# Altium PCB PCB1.1.PcbDoc
Units mil, origin at the board's own origin, x right, y up, seen from the top; angles counter-clockwise.
Board outline 7697 x 1698 mil, 2 copper layers (Top Layer, Bottom Layer); 47 components, 80 nets, 308 pads, 105 vias.
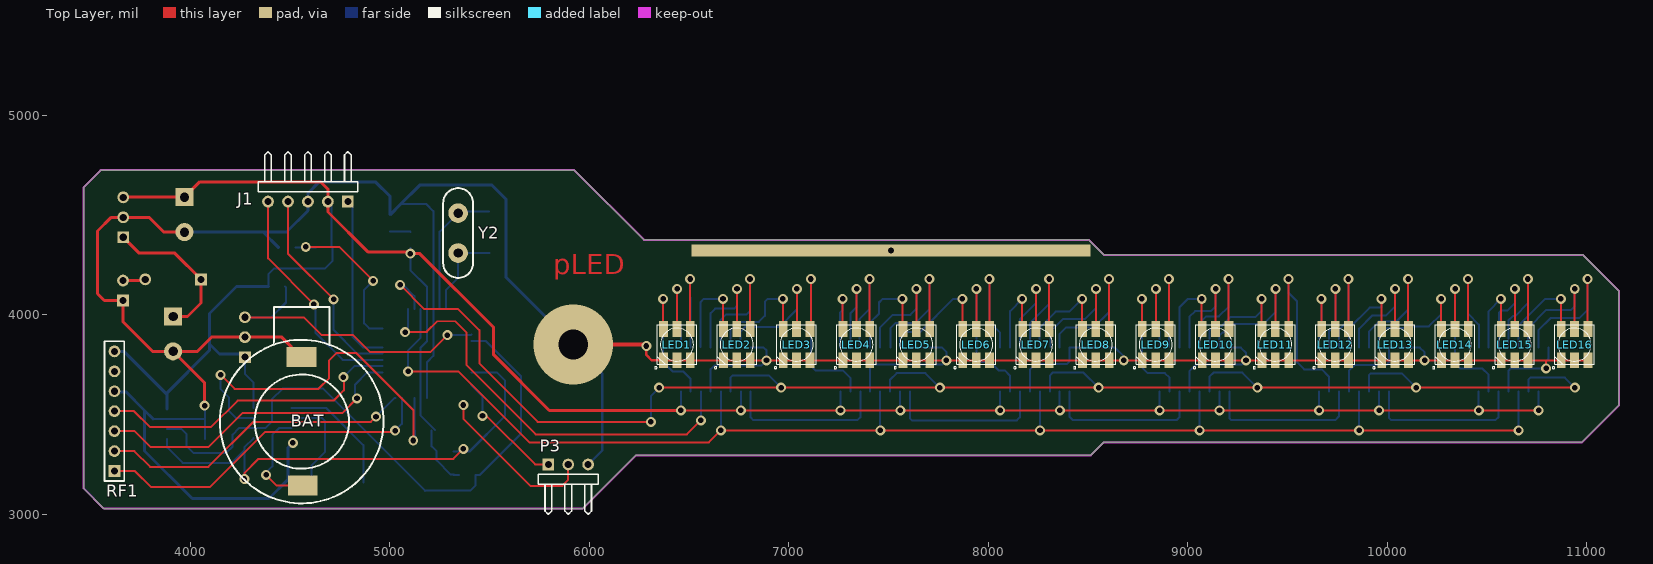
[diagram p0: Top Layer view]
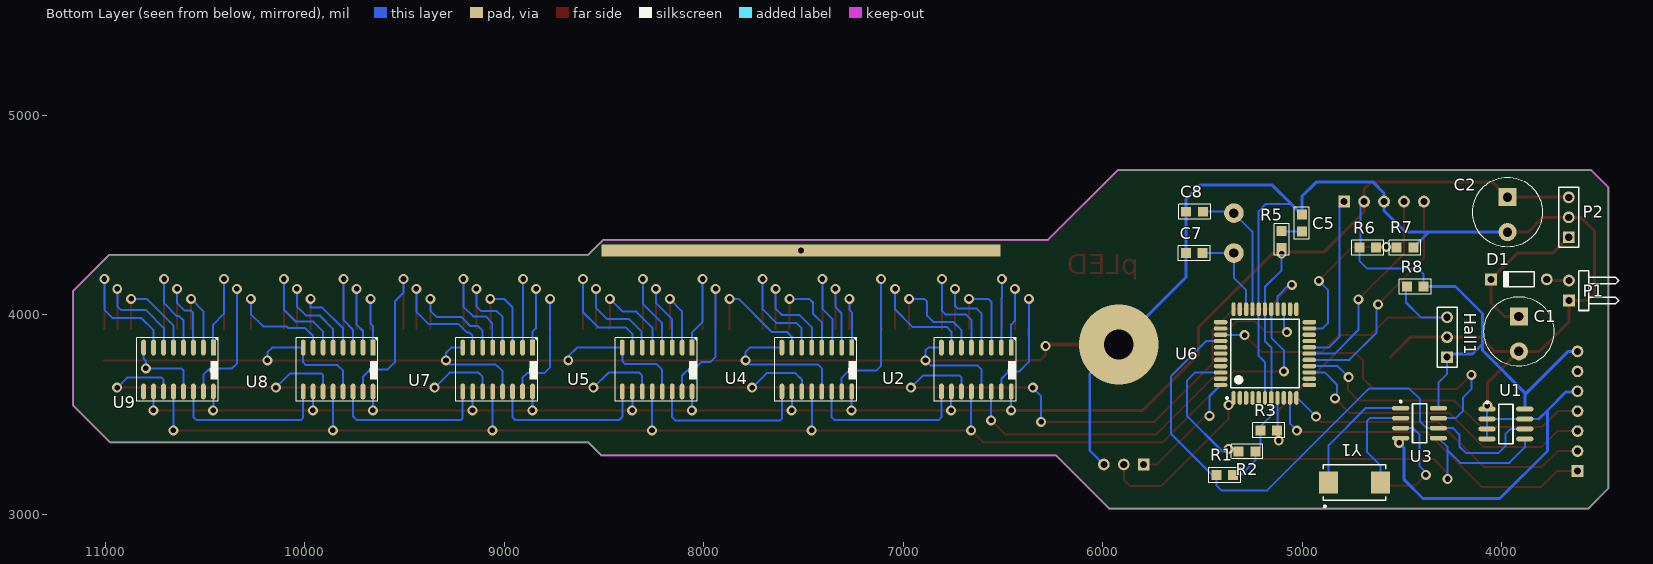
[diagram p1: Bottom Layer view, seen from below]

## Layer stack, top to bottom
Top Layer: signal copper 1.4
Dielectric: dielectric 12.6, FR-4, Dk 4.8
Bottom Layer: signal copper 1.4

## Board outline
3465,3129 3567,3027 5967,3027 6235,3295 8515,3295 8580,3360 10978,3360 11162,3544 11162,4119 10981,4300 8580,4300 8505,4375 6275,4375 5925,4725 3550,4725 3550.5,4724.5 3550.5,4723.5 3465,4638

## Design rules (kind name [scope] priority, off if disabled: settings)
Clearance [All] p1: gap=10
DiffPairsRouting [All] p1: maxlimit=15 minlimit=10 mostfreqgap=10 maxuncoupledlength=500
PolygonConnect [All] p1: connectstyle=Relief reliefconductorwidth=10 reliefentries=4 polygonreliefangle="90 Angle" airgapwidth=10
RoutingVias [All] p1: holewidth=28 width=50 viastyle="Through Hole" minholewidth=28 minwidth=50 maxholewidth=28 maxwidth=50
SilkscreenOverComponentPads [All] p1: minsilkscreentomaskgap=10
SolderMaskExpansion [All] p1: expansion=4
Width [All] p1: maxlimit=10 minlimit=10 preferedwidth=10
26 further rules are at their usual default settings.

## Classes and differential pairs
net class Bat_Nets: GND NetBat_2
net class C1_Nets: GND NetC1_1
net class C2_Nets: GND VCC
net class C5_Nets: GND NetC5_2
net class C7_Nets: GND NetC7_2
net class C8_Nets: GND NetC8_2
net class D1_Nets: NetC1_1 NetD1_1
net class Hall1_Nets: GND SIGHALL VCC
net class J1_Nets: GND MCLR PGC PGD VCC
net class LED1_Nets: GND NetLED1_1 NetLED1_2 NetLED1_3
net class LED2_Nets: GND NetLED2_1 NetLED2_2 NetLED2_3
net class LED3_Nets: GND NetLED3_1 NetLED3_2 NetLED3_3
net class LED4_Nets: GND NetLED4_1 NetLED4_2 NetLED4_3
net class LED5_Nets: GND NetLED5_1 NetLED5_2 NetLED5_3
net class LED6_Nets: GND NetLED6_1 NetLED6_2 NetLED6_3
net class LED7_Nets: GND NetLED7_1 NetLED7_2 NetLED7_3
net class LED8_Nets: GND NetLED8_1 NetLED8_2 NetLED8_3
net class LED9_Nets: GND NetLED9_1 NetLED9_2 NetLED9_3
net class LED10_Nets: GND NetLED10_1 NetLED10_2 NetLED10_3
net class LED11_Nets: GND NetLED11_1 NetLED11_2 NetLED11_3
net class LED12_Nets: GND NetLED12_1 NetLED12_2 NetLED12_3
net class LED13_Nets: GND NetLED13_1 NetLED13_2 NetLED13_3
net class LED14_Nets: GND NetLED14_1 NetLED14_2 NetLED14_3
net class LED15_Nets: GND NetLED15_1 NetLED15_2 NetLED15_3
net class LED16_Nets: GND NetLED16_1 NetLED16_2 NetLED16_3
net class P1_Nets: GND NetD1_1
net class P2_Nets: GND NetC1_1 VCC
net class P3_Nets: GND RX TX
net class R1_Nets: SCL VCC
net class R2_Nets: SDA VCC
net class R3_Nets: SQW VCC
net class R5_Nets: NetC5_2 VCC
net class R6_Nets: VCC VIN+
net class R7_Nets: GND VIN+
net class R8_Nets: SIGHALL VCC
net class RF1_Nets: GND NetRF1_1 NetRF1_2 NetRF1_3 NetRF1_4 NetRF1_6 VCC
net class U1_Nets: GND SCL SDA VCC
net class U2_Nets: CLOCK DO ENABLE GND NetLED1_1 NetLED1_2 NetLED1_3 NetLED2_1 NetLED2_2 NetLED2_3 NetLED3_2 NetLED3_3 NetU2_9 VCC
net class U3_Nets: GND NetBat_2 NetU3_1 NetU3_2 SCL SDA SQW VCC
net class U4_Nets: CLOCK ENABLE GND NetLED3_1 NetLED4_1 NetLED4_2 NetLED4_3 NetLED5_1 NetLED5_2 NetLED5_3 NetLED6_3 NetU2_9 NetU4_9 VCC
net class U5_Nets: CLOCK ENABLE GND NetLED6_1 NetLED6_2 NetLED7_1 NetLED7_2 NetLED7_3 NetLED8_1 NetLED8_2 NetLED8_3 NetU4_9 NetU5_9 VCC
net class U6_Nets: CLOCK DO ENABLE GND MCLR NetC7_2 NetC8_2 NetRF1_1 NetRF1_2 NetRF1_3 NetRF1_4 NetU6_2 NetU6_3 NetU6_4 NetU6_5 NetU6_9 NetU6_12 NetU6_13 NetU6_19 NetU6_20 NetU6_22 NetU6_23 NetU6_24 NetU6_32 NetU6_33 NetU6_34 NetU6_35 NetU6_38 NetU6_39 NetU6_40 NetU6_41 NetU6_43 PGC PGD RX SCL SDA SIGHALL SQW TX VCC VIN+
net class U7_Nets: CLOCK ENABLE GND NetLED9_1 NetLED9_2 NetLED9_3 NetLED10_1 NetLED10_2 NetLED10_3 NetLED11_2 NetLED11_3 NetU5_9 NetU7_9 VCC
net class U8_Nets: CLOCK ENABLE GND NetLED11_1 NetLED12_1 NetLED12_2 NetLED12_3 NetLED13_1 NetLED13_2 NetLED13_3 NetLED14_3 NetU7_9 NetU8_9 VCC
net class U9_Nets: CLOCK ENABLE GND NetLED14_1 NetLED14_2 NetLED15_1 NetLED15_2 NetLED15_3 NetLED16_1 NetLED16_2 NetLED16_3 NetU8_9 VCC
net class Y1_Nets: NetU3_1 NetU3_2
net class Y2_Nets: NetC7_2 NetC8_2

## Components (designator, comment, footprint, x,y, rotation, side; value= is the part's Value field where it differs from the comment)
BAT "Battery" BATTERY 4559,3864 r270 top
C1 "Cap Pol3" "CAP POL 2" 3914,3991 r270 bottom
C2 "Cap Pol3" "CAP POL 2" 3971,4589 r270 bottom
C5 "Cap Semi" SM/C_0805 5002,4501 r270 bottom
C7 "Cap Semi" SM/C_0805 5584,4309 r180 bottom
C8 "Cap Semi" SM/C_0805 5582,4516 r180 bottom
D1 "Diode 1N4148" DO-35 3914,4177 r0 bottom
Hall1 "Header 3" HDR1X3 4274,3787 r90 bottom
J1 "Programming" HDR1X5H 4790,4567 r180 top
LED1 "or 5050 LEDs, the order of the LEDs may vary from one manufacturer to another!" RGBLED5050 6440,3850 r270 top
LED2 "or 5050 LEDs, the order of the LEDs may vary from one manufacturer to another!" RGBLED5050 6740,3850 r270 top
LED3 "or 5050 LEDs, the order of the LEDs may vary from one manufacturer to another!" RGBLED5050 7040,3850 r270 top
LED4 "or 5050 LEDs, the order of the LEDs may vary from one manufacturer to another!" RGBLED5050 7340,3850 r270 top
LED5 "or 5050 LEDs, the order of the LEDs may vary from one manufacturer to another!" RGBLED5050 7640,3850 r270 top
LED6 "or 5050 LEDs, the order of the LEDs may vary from one manufacturer to another!" RGBLED5050 7940,3850 r270 top
LED7 "or 5050 LEDs, the order of the LEDs may vary from one manufacturer to another!" RGBLED5050 8240,3850 r270 top
LED8 "or 5050 LEDs, the order of the LEDs may vary from one manufacturer to another!" RGBLED5050 8540,3850 r270 top
LED9 "or 5050 LEDs, the order of the LEDs may vary from one manufacturer to another!" RGBLED5050 8840,3850 r270 top
LED10 "or 5050 LEDs, the order of the LEDs may vary from one manufacturer to another!" RGBLED5050 9140,3850 r270 top
LED11 "or 5050 LEDs, the order of the LEDs may vary from one manufacturer to another!" RGBLED5050 9440,3850 r270 top
LED12 "or 5050 LEDs, the order of the LEDs may vary from one manufacturer to another!" RGBLED5050 9740,3850 r270 top
LED13 "or 5050 LEDs, the order of the LEDs may vary from one manufacturer to another!" RGBLED5050 10040,3850 r270 top
LED14 "or 5050 LEDs, the order of the LEDs may vary from one manufacturer to another!" RGBLED5050 10340,3850 r270 top
LED15 "or 5050 LEDs, the order of the LEDs may vary from one manufacturer to another!" RGBLED5050 10640,3850 r270 top
LED16 "or 5050 LEDs, the order of the LEDs may vary from one manufacturer to another!" RGBLED5050 10940,3850 r270 top
P1 "DC 12V" HDR1X2H 3663,4071 r90 bottom
P2 "7805" HDR1X3 3664,4388 r90 bottom
P3 "Header 3H" HDR1X3H 5795,3249 r0 top
R1 "Res Semi" SM/C_0805 5431,3196 r180 bottom
R2 "Res Semi" SM/C_0805 5319,3314 r180 bottom
R3 "Res Semi" SM/C_0805 5210,3420 r180 bottom
R5 "Res Semi" SM/C_0805 5104,4419 r270 bottom
R6 "Res Semi" SM/C_0805 4630,4336 r0 bottom
R7 "Res Semi" SM/C_0805 4443,4336 r0 bottom
R8 "Res Semi" SM/C_0805 4476,4141 r180 bottom
RF1 "RF Module" HDR1X7 3620,3216 r90 top
U1 "AT24C01BN-SP25-T" 8S1_N 3979,3452 r180 bottom
U2 "74595" SO16 6459,3835 r270 bottom
U3 "DS1307Z" SOIC8N_N 4412,3456 r180 bottom
U4 "74595" SO16 7259,3835 r270 bottom
U5 "74595" SO16 8059,3835 r270 bottom
U6 "PIC16F887-E/PT" TQFP-PT44_N 5187,3805 r90 bottom
U7 "74595" SO16 8859,3835 r270 bottom
U8 "74595" SO16 9659,3835 r270 bottom
U9 "74595" SO16 10459,3835 r270 bottom
Y1 "32,768KHz" CFPX-93 4738,3158 r180 bottom
Y2 "20MHz" CRYSTAL 5343,4309 r90 top

## Footprints (in the part's own frame and the unit in brackets; to place one, negate y for a bottom-side part, rotate by r counter-clockwise, add the part's x,y. Pads: shape width x height; smd on the part's side, far side on the other; paste and mask are expansions set on the pad)
8S1_N [mm] "SOIC, 8-Leads, Body 4.9x3.9mm, Pitch 1.27mm, IPC Medium Density"
  oval 2.2x0.6 smd: 1(-2.4,1.905) 2(-2.4,0.635) 3(-2.4,-0.635) 4(-2.4,-1.905) 5(2.4,-1.905) 6(2.4,-0.635) 7(2.4,0.635) 8(2.4,1.905)
  silkscreen extent -2.53,-2.5 0.9,2.88, body extent -2,-2.5 2,2.5, height 1.75
BATTERY [mil]
  rect 100x150 smd: 1(76,-1) 2(721,5)
  silkscreen extent -175,-410 810,410
"CAP POL 2" [mil]
  rect 90.53x90.53 hole 47.23: 1(0,0)
  round 90.53 hole 47.23: 2(175,0)
  silkscreen extent -100,-175 250,175
CFPX-93 [mm] "Surface Mount Quartz Crystal; Body 8.2 x 4.7 mm (LxW max)"
  rect 2.4x2.8 smd: 1(-3.3,0) 2(3.3,0)
  silkscreen extent -4,-3.14 4,2.25
CRYSTAL [mil]
  round 98.43 hole 47.23: 1(0,0) 2(200,0)
  silkscreen extent -125,-75 325,75
DO-35 [mm] "Diode, Axial; Body 3.8 x 1.9 mm (LxDia. max), Lead Dia. 0.53 mm (max)"
  round 1.5 hole 0.9: 1(-3.55,0)
  rect 1.5x1.5 hole 0.9: 2(3.55,0)
  silkscreen extent -1.95,-0.95 2.05,0.95
HDR1X2H [mm] "Connector; Header; 2 Position; Right Angle"
  rect 1.5x1.5 hole 0.9: 1(0,0)
  round 1.5 hole 0.9: 2(2.54,0)
  silkscreen extent -1.27,-6.35 3.81,-1.27
HDR1X3 [mm] "Connector; Header; 3 Position"
  rect 1.5x1.5 hole 0.9: 1(0,0)
  round 1.5 hole 0.9: 2(2.54,0) 3(5.08,0)
  silkscreen extent -1.27,-1.27 6.35,1.27
HDR1X3H [mm] "Connector; Header; 3 Position; Right Angle"
  rect 1.5x1.5 hole 0.9: 1(0,0)
  round 1.5 hole 0.9: 2(2.54,0) 3(5.08,0)
  silkscreen extent -1.27,-6.35 6.35,-1.27
HDR1X5H [mm] "Connector; Header; 5 Position; Right Angle"
  rect 1.5x1.5 hole 0.9: 1(0,0)
  round 1.5 hole 0.9: 2(2.54,0) 3(5.08,0) 4(7.62,0) 5(10.16,0)
  silkscreen extent -1.27,-6.35 11.43,-1.27
HDR1X7 [mm] "Connector; Header; 7 Position"
  rect 1.5x1.5 hole 0.9: 1(0,0)
  round 1.5 hole 0.9: 2(2.54,0) 3(5.08,0) 4(7.62,0) 5(10.16,0) 6(12.7,0) 7(15.24,0)
  silkscreen extent -1.27,-1.27 16.51,1.27
RGBLED5050 [mil]
  rect 79x44 smd: 1(-78.74,67) 2(-78.74,0) 3(-78.74,-66.93) 4(79,-66.93) 5(79,0) 6(79,67)
  silkscreen extent -98,-112 122,99
SM/C_0805 [mil]
  rect 50x50 smd: 1(0,0) 2(84,0)
  silkscreen extent -38,-38 122,38
SO16 [mil]
  rect 80x24 smd: 1(0,0)
  oval 80x24 smd: 2(0,-50) 3(0,-100) 4(0,-150) 5(0,-200) 6(0,-250) 7(0,-300) 8(0,-350) 9(220,-350) 10(220,-300) 11(220,-250) 12(220,-200) 13(220,-150) 14(220,-100) 15(220,-50) 16(220,0)
  silkscreen extent -50,-385 270,25, body extent -20,-385 240,25, height 61
SOIC8N_N [mm] "SOIC, 8-Leads, Body 4.9x3.9mm, Pitch 1.27mm, IPC Medium Density"
  oval 2.2x0.6 smd: 1(-2.4,1.905) 2(-2.4,0.635) 3(-2.4,-0.635) 4(-2.4,-1.905) 5(2.4,-1.905) 6(2.4,-0.635) 7(2.4,0.635) 8(2.4,1.905)
  silkscreen extent -2.53,-2.5 0.9,2.88, body extent -2,-2.5 2,2.5, height 1.75
TQFP-PT44_N [mm] "Thin QFP, 44-Leads, Body 10x10mm, Pitch 0.8mm, IPC Medium Density"
  oval 1.75x0.55 smd: 1(-5.65,4) 2(-5.65,3.2) 3(-5.65,2.4) 4(-5.65,1.6) 5(-5.65,0.8) 6(-5.65,0) 7(-5.65,-0.8) 8(-5.65,-1.6) 9(-5.65,-2.4) 10(-5.65,-3.2) 11(-5.65,-4) 23(5.65,-4) 24(5.65,-3.2) 25(5.65,-2.4) 26(5.65,-1.6) 27(5.65,-0.8) 28(5.65,0) 29(5.65,0.8) 30(5.65,1.6) 31(5.65,2.4) 32(5.65,3.2) 33(5.65,4)
  oval 0.55x1.75 smd: 12(-4,-5.65) 13(-3.2,-5.65) 14(-2.4,-5.65) 15(-1.6,-5.65) 16(-0.8,-5.65) 17(0,-5.65) 18(0.8,-5.65) 19(1.6,-5.65) 20(2.4,-5.65) 21(3.2,-5.65) 22(4,-5.65) 34(4,5.65) 35(3.2,5.65) 36(2.4,5.65) 37(1.6,5.65) 38(0.8,5.65) 39(0,5.65) 40(-0.8,5.65) 41(-1.6,5.65) 42(-2.4,5.65) 43(-3.2,5.65) 44(-4,5.65)
  silkscreen extent -5.77,-4.35 4.35,4.95, body extent -5,-5 5,5, height 1.2

## Part data
C1 C2: "Polarized Capacitor (Surface Mount)"
C5 C7 C8: "Capacitor (Semiconductor SIM Model)"
D1: "High Conductance Fast Diode"
Hall1: "Header, 3-Pin"
J1: library part "Header 5H", "Header, 5-Pin, Right Angle"
LED1 LED2 LED3 LED4 LED5 LED6 LED7 LED8 LED9 LED10 LED11 LED12 LED13 LED14 LED15 LED16: library part RGBLED5050
P1: library part "Header 2H", "Header, 2-Pin, Right Angle"
P2: library part "Header 3", "Header, 3-Pin"
P3: "Header, 3-Pin, Right Angle"
R1 R2 R3 R5 R6 R7 R8: "Semiconductor Resistor"
RF1: library part "Header 7", "Header, 7-Pin"
U1: "1Kbit (128 x 8), 2-wire Bus Automotive Serial EEPROM with Write Protect, 2.5V, 8-Pin SOIC, Tape & Reel"
U2 U4 U5 U7 U8 U9: "8-BIT SFT REG WIRTH OUTPUT LCH"
U3: "64 X 8 Serial Real-Time Clock"
U6: "Flash-Based, 8-Bit CMOS Microcontroller with nanoWatt Technology, 8K (x14-Bit words) Program Memory, 624 Bytes Data Memory, 35 I/O pins, 44-Pin TQFP, Standard VDD Range, Extended Temperature"
Y1: library part CFPX-93, "Surface Mount Quartz Crystal"
Y2: library part XTAL

## Free pads (board coordinates)
  rect 2000x60 hole 30: 0(7513,4321)

## Via types
v1: diameter 50, hole 28, Top Layer to Bottom Layer, 103 vias
v2: diameter 50/50 (per signal layer), hole 28, Top Layer to Bottom Layer, 1 vias
v3: diameter 400, hole 150, Top Layer to Bottom Layer, 1 vias

## Nets (pads, with @x,y where several pads share a name; then routed paths per layer and width w, separated by ;. In a path a pad name is that pad's centre, name@x,y a point inside that pad or via, vN(x,y) a via of type N, cw(c..) or ccw(c..) an arc to the next point about the centre after c; other vN are vias at no path point)
CLOCK: U2.11 U4.11 U5.11 U6.26 U7.11 U8.11 U9.11 | length 8668.5
  Top Layer w10: v1(5052,4149) 5173,4028 5343,4028 5449,3922 5449,3756 5742,3463 v1(6309,3463) ; v1(6351,3634) v1(6962,3634) v1(7758,3634) v1(8554,3634) v1(9350,3634) v1(10146,3634) v1(10942,3634)
  Bottom Layer w10: v1(5052,4149) 5068,4149 5124.01,4092.99 U6.26 ; v1(6309,3463) 6309,3592 v1(6351,3634) ; U2.11 6709,3686 6719,3696 6900,3696 v1(6962,3634) ; U4.11 7509,3675 7541,3707 7685,3707 v1(7758,3634) ; U5.11 8309,3694 8325,3710 8478,3710 v1(8554,3634) ; U7.11 9109,3688 9130,3709 9275,3709 v1(9350,3634) ; U8.11 9909,3697 9916,3704 10076,3704 v1(10146,3634) ; U9.11 10709,3674 10719,3684 10892,3684 v1(10942,3634)
DO: U2.14 U6.25 | length 2133.3
  Top Layer w10: v1(5077,3912) 5187,3912 5187,3916 5238,3967 5328,3967 5384,3911 5384,3748 5732,3400 6490,3400 v1(6560,3470)
  Bottom Layer w10: v1(5077,3912) 5092.51,3927.51 U6.25 ; v1(6560,3470) U2.14@6560,3614
ENABLE: U2.12 U4.12 U5.12 U6.27 U7.12 U8.12 U9.12 | length 7242.1
  Top Layer w10: v1(5092,3716) 5344,3716 5700,3360 6600,3360 v1(6660,3420) v1(7460,3420) v1(8260,3420) v1(9060,3420) v1(9860,3420) v1(10660,3420)
  Bottom Layer w10: v1(5092,3716) 5092,3821 5155.5,3884.5 U6.27 ; v1(6660,3420) U2.12@6660,3614 ; v1@7459,3421 U4.12 ; v1@8259,3421 U5.12 ; v1@9059,3421 U7.12 ; v1@9859,3421 U8.12 ; v1@10659,3421 U9.12
GND: BAT.1 C1.2 C2.2 C5.1 C7.1 C8.1 Hall1.2 J1.3 LED1.4 LED1.5 LED1.6 LED2.4 LED2.5 LED2.6 LED3.4 LED3.5 LED3.6 LED4.4 LED4.5 LED4.6 LED5.4 LED5.5 LED5.6 LED6.4 LED6.5 LED6.6 LED7.4 LED7.5 LED7.6 LED8.4 LED8.5 LED8.6 LED9.4 LED9.5 LED9.6 LED10.4 LED10.5 LED10.6 LED11.4 LED11.5 LED11.6 LED12.4 LED12.5 LED12.6 LED13.4 LED13.5 LED13.6 LED14.4 LED14.5 LED14.6 LED15.4 LED15.5 LED15.6 LED16.4 LED16.5 LED16.6 P1.1 P2.2 P3.3 R7.1 RF1.5 U1.1 U1.2 U1.3 U1.4 U1.7 U2.8 U2.13 U3.4 U4.8 U4.13 U5.8 U5.13 U6.6 U6.29 U7.8 U7.13 U8.8 U8.13 U9.8 U9.13 | length 17822.8
  Top Layer w10: v1@6280,3850 v1(6287,3843) ; LED1.4 LED1.5 LED1.6 LED2.4 LED2.5 LED2.6 v1(6889,3771) v1@6907,3771 ; v1@6906,3770 v1@6907,3771 ; v1(10798,3731) 10798,3768 ; LED16.6 LED16.5 LED16.4 LED15.6 LED15.5 LED15.4 LED14.6 LED14.5 LED14.4 v1(10188,3771) LED13.6 LED13.5 LED13.4 LED12.6 LED12.5 LED12.4 LED11.6 LED11.5 LED11.4 v1(9293,3771) LED10.6 LED10.5 LED10.4 LED9.6 LED9.5 LED9.4 v1(8680,3771) LED8.6 LED8.5 LED8.4 LED7.6 LED7.5 LED7.4 LED6.6 LED6.5 LED6.4 v1(7791,3771) LED5.6 LED5.5 LED5.4 LED4.6 LED4.5 LED4.4 LED3.6 LED3.5 LED3.4 v1@6907,3771
  Top Layer w12: v1(6287,3843) 6287,3798 6314,3771 LED1.4
  Top Layer w15: C2.2 3867,4414 3793,4488 P2.2 3604,4488 3535,4419 3535,4105 3569,4071 P1.1 3663,3964 3811,3816 C1.2 ; v1@4072,3563 4072,3658 C1.2 ; BAT.1 4459,3887 Hall1.2 4107,3887 4036,3816 C1.2
  Top Layer w20: v3(5920,3850) v1@6280,3850
  Bottom Layer w10: 3814,3477 U1.7 U1.2 ; U1.4 U1.3 U1.2 ; U1.1 U1.2 ; 5057,4556 5182,4556 5218.5,4519.5 U6.29 5218.5,3793.5 5187,3762 U6.6 ; C8.1 C8.1@5584,4514 ; U2.13 6609,3727 6627,3745 6863,3745 v1(6889,3771) 6889,3821 6875,3835 U2.8 ; U4.13 7409,3731 7429,3751 7771,3751 ; U4.8 7769,3835 7791,3813 v1(7791,3771) ; U5.13 8209,3724 8237,3752 8394,3752 8409,3767 U5.8 8636,3835 8680,3791 v1(8680,3771) ; U7.13 9009,3717 9034,3742 9037,3742 9044,3749 9271,3749 v1(9293,3771) 9293,3809 9267,3835 U7.8 ; U8.13 9809,3718 9838,3747 9995,3747 10009,3761 U8.8 10165,3835 10188,3812 v1(10188,3771) ; U9.13 10609,3719 10621,3731 v1(10798,3731) 10798,3767 10809,3778 U9.8
  Bottom Layer w12: v3(5920,3850) 6066,3704 6066,3320 P3.3
  Bottom Layer w15: RF1.5@3617,3613 3678,3613 3771,3520 ; 3814,3477 3771,3520 ; C2.2 4365,4414 ; R7.1 4365,4414 ; v1(4514,3357) 4489,3332 4489,3172 4395,3078 4010,3078 3771,3317 3771,3520 ; C8.1 5582,4580 5513,4649 5150,4649 5057,4556 C5.1 5002,4592 4928,4666 4647,4666 4590,4609 J1.3 4590,4521 4483,4414 4365,4414 ; C8.1@5584,4514 C7.1 5584,4186 v3(5920,3850)
  other v1: 4072,3544
MCLR: J1.1 U6.18 | length 860.8
  Bottom Layer w10: J1.1 4813,4544 4813,3889 4865.5,3836.5 U6.18
NetBat_2: BAT.2 U3.3 | length 548.8
  Top Layer w10: v1@4374.5,3201.5 4433,3143 BAT.2
  Bottom Layer w10: v1@4364,3191 4412,3239 4412,3398 4445,3431 U3.3
  other v1: 4380,3197
NetC1_1: C1.1 D1.2 P2.1 | length 763.2
  Top Layer w15: P2.1 3744,4308 3922.76,4308 D1.2 4053.76,4058.76 3986,3991 C1.1
NetC5_2: C5.2 R5.1 | length 102.8
  Bottom Layer w10: C5.2 5102,4417 R5.1@5104,4415
NetC7_2: C7.2 U6.31 Y2.1 | length 464
  Bottom Layer w10: U6.31 5281.49,4123.49 5343,4185 Y2.1 C7.2
NetC8_2: C8.2 U6.30 Y2.2 | length 678
  Bottom Layer w10: U6.30 5249.99,4415.99 Y2.2 5350,4516 C8.2
NetD1_1: D1.1 P1.2 | length 113.7
  Top Layer w10: D1.1@3768.24,4171 D1.1
  Top Layer w15: P1.2 D1.1@3768.24,4171
NetLED1_1: LED1.1 U2.2 | length 597.3
  Top Layer w10: LED1.1@6505,3930.74 LED1.1@6506,3929.74 ; v2(6506,4179) LED1.1@6506,3929.74 ; LED1.1 LED1.1@6506,3929.74
  Bottom Layer w10: v2(6506,4179) 6506,4087 6508,4085 6508,3836 U2.2
NetLED1_2: LED1.2 U2.1 | length 501.5
  Top Layer w10: LED1.2 6441,3929.74 v1(6441,4129)
  Bottom Layer w10: v1(6441,4129) 6441,3969 6460,3950 U2.1@6460,3836
NetLED1_3: LED1.3 U2.15 | length 738.9
  Top Layer w10: v1(6371,4079) 6370,4078 6370,3931.81 LED1.3 6374,3927.81 LED1.3@6374,3893
  Bottom Layer w10: v1(6371,4079) 6371,3763 6419,3715 6472,3715 6508,3679 U2.15@6508,3616
NetLED2_1: LED2.1 U2.5 | length 716.7
  Top Layer w10: LED2.1@6805,3930.74 LED2.1@6806,3929.74 ; v1(6806,4179) LED2.1@6806,3929.74 ; LED2.1 LED2.1@6806,3929.74
  Bottom Layer w10: U2.5@6658,3836 6658,3973 6685,4000 6788,4000 6806,4018 v1(6806,4179)
NetLED2_2: LED2.2 U2.4 | length 605.6
  Top Layer w10: LED2.2 6741,3929.74 v1(6741,4129)
  Bottom Layer w10: U2.4 6609,4008 6631,4030 6727,4030 6741,4044 v1(6741,4129)
NetLED2_3: LED2.3 U2.3 | length 498
  Top Layer w10: LED2.3@6670,3931.81 LED2.3@6671,3930.81 ; v1(6671,4079) LED2.3@6671,3930.81 ; LED2.3 LED2.3@6671,3930.81
  Bottom Layer w10: U2.3@6557,3837 6557,4061 6575,4079 v1(6671,4079)
NetLED3_1: LED3.1 U4.15 | length 978.8
  Top Layer w10: LED3.1 7111,3932.74 v1(7111,4179)
  Bottom Layer w10: v1(7111,4179) 7111,3743 7135,3719 7273,3719 7309,3683 U4.15
NetLED3_2: LED3.2 U2.7 | length 711.7
  Top Layer w10: LED3.2 7041,3929.74 v1(7041,4129)
  Bottom Layer w10: U2.7 6759,3915 6781,3937 6952,3937 7041,4026 v1(7041,4129)
NetLED3_3: LED3.3 U2.6 | length 607
  Top Layer w10: LED3.3@6970,3931.81 LED3.3@6971,3930.81 ; v1(6971,4079) LED3.3@6971,3930.81 ; LED3.3 LED3.3@6971,3930.81
  Bottom Layer w10: U2.6@6708,3836 6708,3921 6751,3964 6851,3964 6881,3994 6881,4064 6896,4079 v1(6971,4079)
NetLED4_1: LED4.1 U4.3 | length 613.2
  Top Layer w10: LED4.1@7405,3930.74 LED4.1@7406,3929.74 ; v1(7406,4179) LED4.1@7406,3929.74 ; LED4.1 LED4.1@7406,3929.74
  Bottom Layer w10: U4.3@7355,3839 7355,3978 7406,4029 v1(7406,4179)
NetLED4_2: LED4.2 U4.2 | length 506.5
  Top Layer w10: LED4.2 7341,3929.74 v1(7341,4129)
  Bottom Layer w10: U4.2@7310,3836 7310,4008 7341,4039 v1(7341,4129)
NetLED4_3: LED4.3 U4.1 | length 400.9
  Top Layer w10: LED4.3@7270,3931.81 LED4.3@7271,3930.81 ; v1(7271,4079) LED4.3@7271,3930.81 ; LED4.3 LED4.3@7271,3930.81
  Bottom Layer w10: U4.1@7258,3836 7258,4012 7271,4025 v1(7271,4079)
NetLED5_1: LED5.1 U4.6 | length 733.4
  Top Layer w10: v1(7705,4179) 7705,3930.74 LED5.1
  Bottom Layer w10: U4.6@7510,3836 7510,3932 7535,3957 7635,3957 7705,4027 v1(7705,4179)
NetLED5_2: LED5.2 U4.5 | length 620.8
  Top Layer w10: LED5.2 v1(7640,4129)
  Bottom Layer w10: U4.5 7459,3936 7522,3999 7610,3999 7640,4029 v1(7640,4129)
NetLED5_3: LED5.3 U4.4 | length 520.8
  Top Layer w10: v1(7570,4079) 7570,3931.81 LED5.3
  Bottom Layer w10: U4.4 7409,3961 7453,4005 7453,4061 7470,4078 7470,4079 v1(7570,4079)
NetLED6_1: LED6.1 U5.1 | length 618
  Top Layer w10: LED6.1@8005,3930.74 LED6.1@8006,3929.74 ; v1(8006,4179) LED6.1@8006,3929.74 ; LED6.1 LED6.1@8006,3929.74
  Bottom Layer w10: v1(8006,4179) 8006,3964 8059,3911 U5.1
NetLED6_2: LED6.2 U5.15 | length 828.2
  Top Layer w10: LED6.2 7941,3929.74 v1(7941,4129)
  Bottom Layer w10: v1(7941,4129) 7941,3788 7966,3763 8010,3763 8052,3721 8083,3721 8109,3695 U5.15
NetLED6_3: LED6.3 U4.7 | length 597.8
  Top Layer w10: LED6.3@7870,3931.81 LED6.3@7871,3930.81 ; v1(7871,4079) LED6.3@7871,3930.81 ; LED6.3 LED6.3@7871,3930.81
  Bottom Layer w10: U4.7 7559,3890 7582,3913 7659,3913 7825,4079 v1(7871,4079)
NetLED7_1: LED7.1 U5.4 | length 634.9
  Top Layer w10: v1(8306,4179) 8306,3929.74 LED7.1
  Bottom Layer w10: U5.4 8209,3958 8306,4055 v1(8306,4179)
NetLED7_2: LED7.2 U5.3 | length 527.2
  Top Layer w10: LED7.2 8241,3929.74 v1(8241,4129)
  Bottom Layer w10: U5.3@8160,3836 8160,3979 8241,4060 v1(8241,4129)
NetLED7_3: LED7.3 U5.2 | length 420.8
  Top Layer w10: LED7.3@8170,3931.81 LED7.3@8171,3930.81 ; v1(8171,4079) LED7.3@8171,3930.81 ; LED7.3 LED7.3@8171,3930.81
  Bottom Layer w10: U5.2@8110,3836 8110,4018 v1(8171,4079)
NetLED8_1: LED8.1 U5.7 | length 779.8
  Top Layer w10: LED8.1@8605,3930.74 LED8.1@8606,3929.74 ; v1(8606,4179) LED8.1@8606,3929.74 ; LED8.1 LED8.1@8606,3929.74
  Bottom Layer w10: U5.7 8359,3904 8391,3936 8530,3936 8606,4012 v1(8606,4179)
NetLED8_2: LED8.2 U5.6 | length 650.4
  Top Layer w10: LED8.2 8541,3929.74 v1(8541,4129)
  Bottom Layer w10: U5.6@8312,3838 8312,3915 8375,3978 8484,3978 8541,4035 v1(8541,4129)
NetLED8_3: LED8.3 U5.5 | length 524.2
  Top Layer w10: LED8.3@8470,3931.81 LED8.3@8471,3930.81 ; v1(8471,4079) LED8.3@8471,3930.81 ; LED8.3 LED8.3@8471,3930.81
  Bottom Layer w10: U5.5@8258,3836 8258,3935 8338,4015 8407,4015 v1(8471,4079)
NetLED9_1: LED9.1 U7.2 | length 593.1
  Top Layer w10: LED9.1@8905,3930.74 LED9.1@8906,3929.74 ; v1(8906,4179) LED9.1@8906,3929.74 ; LED9.1 LED9.1@8906,3929.74
  Bottom Layer w10: U7.2@8906,3838 v1(8906,4179)
NetLED9_2: LED9.2 U7.1 | length 502.1
  Top Layer w10: LED9.2 8841,3929.74 v1(8841,4129)
  Bottom Layer w10: v1(8841,4129) 8841,3934 8859,3916 U7.1
NetLED9_3: LED9.3 U7.15 | length 722.9
  Top Layer w10: LED9.3@8770,3931.81 LED9.3@8771,3930.81 ; v1(8771,4079) LED9.3@8771,3930.81 ; LED9.3 LED9.3@8771,3930.81
  Bottom Layer w10: v1(8771,4079) 8771,3737 8801,3707 8886,3707 8910,3683 U7.15@8910,3616
NetLED10_1: LED10.1 U7.5 | length 691.1
  Top Layer w10: LED10.1@9205,3930.74 LED10.1@9206,3929.74 ; v1(9206,4179) LED10.1@9206,3929.74 ; LED10.1 LED10.1@9206,3929.74
  Bottom Layer w10: U7.5@9061,3837 9061,3958 9094,3991 9157,3991 9206,4040 v1(9206,4179)
NetLED10_2: LED10.2 U7.4 | length 595.6
  Top Layer w10: LED10.2 9141,3929.74 v1(9141,4129)
  Bottom Layer w10: U7.4 9009,3989 9038,4018 9117,4018 9141,4042 v1(9141,4129)
NetLED10_3: LED10.3 U7.3 | length 483.3
  Top Layer w10: LED10.3@9070,3931.81 LED10.3@9071,3930.81 ; v1(9071,4079) LED10.3@9071,3930.81 ; LED10.3 LED10.3@9071,3930.81
  Bottom Layer w10: U7.3 8959,4036 9002,4079 v1(9071,4079)
NetLED11_1: LED11.1 U8.15 | length 951.7
  Top Layer w10: LED11.1@9505,3930.74 LED11.1@9506,3929.74 ; v1(9506,4179) LED11.1@9506,3929.74 ; LED11.1 LED11.1@9506,3929.74
  Bottom Layer w10: v1(9506,4179) 9506,4109 9549,4066 9549,3761 9584,3726 9672,3726 9709,3689 U8.15
NetLED11_2: LED11.2 U7.7 | length 707
  Top Layer w10: LED11.2 9441,3929.74 v1(9441,4129)
  Bottom Layer w10: U7.7 9159,3895 9174,3910 9187,3910 9231,3954 9381,3954 9441,4014 v1(9441,4129)
NetLED11_3: LED11.3 U7.6 | length 600.2
  Top Layer w10: LED11.3@9370,3931.81 LED11.3@9371,3930.81 ; v1(9371,4079) LED11.3@9371,3930.81 ; LED11.3 LED11.3@9371,3930.81
  Bottom Layer w10: U7.6 9109,3919.48 9132.52,3943 9170,3943 9216,3989 9341,3989 9371,4019 v1(9371,4079)
NetLED12_1: LED12.1 U8.3 | length 615.6
  Top Layer w10: LED12.1@9805,3930.74 LED12.1@9806,3929.74 ; v1(9806,4179) LED12.1@9806,3929.74 ; LED12.1 LED12.1@9806,3929.74
  Bottom Layer w10: U8.3 9759,3924 9806,3971 v1(9806,4179)
NetLED12_2: LED12.2 U8.2 | length 507.9
  Top Layer w10: LED12.2 9741,3929.74 v1(9741,4129)
  Bottom Layer w10: U8.2 9709,3918 9741,3950 v1(9741,4129)
NetLED12_3: LED12.3 U8.1 | length 401.5
  Top Layer w10: LED12.3@9670,3931.81 LED12.3@9671,3930.81 ; v1(9671,4079) LED12.3@9671,3930.81 ; LED12.3 LED12.3@9671,3930.81
  Bottom Layer w10: U8.1 9659,3943 9671,3955 v1(9671,4079)
NetLED13_1: LED13.1 U8.6 | length 727.2
  Top Layer w10: LED13.1@10105,3930.74 LED13.1@10106,3929.74 ; v1(10106,4179) LED13.1@10106,3929.74 ; LED13.1 LED13.1@10106,3929.74
  Bottom Layer w10: U8.6@9910,3836 9910,3916.85 9958.15,3965 10045,3965 10106,4026 v1(10106,4179)
NetLED13_2: LED13.2 U8.5 | length 608.5
  Top Layer w10: LED13.2 10041,3929.74 v1(10041,4129)
  Bottom Layer w10: U8.5@9860,3836 9860,3930 9927,3997 9995,3997 10041,4043 v1(10041,4129)
NetLED13_3: LED13.3 U8.4 | length 497.5
  Top Layer w10: LED13.3@9970,3931.81 LED13.3@9971,3930.81 ; v1(9971,4079) LED13.3@9971,3930.81 ; LED13.3 LED13.3@9971,3930.81
  Bottom Layer w10: U8.4 9809,3930.74 9913.26,4035 9971,4035 v1(9971,4079)
NetLED14_1: LED14.1 U9.1 | length 617.5
  Top Layer w10: LED14.1@10405,3930.74 LED14.1@10406,3929.74 ; v1(10406,4179) LED14.1@10406,3929.74 ; LED14.1 LED14.1@10406,3929.74
  Bottom Layer w10: v1(10406,4179) 10406,4004 10460,3950 U9.1@10460,3836
NetLED14_2: LED14.2 U9.15 | length 849.9
  Top Layer w10: LED14.2 10341,3929.74 v1(10341,4129)
  Bottom Layer w10: v1(10341,4129) 10341,3755 10366,3730 10478,3730 10509,3699 U9.15
NetLED14_3: LED14.3 U8.7 | length 644.7
  Top Layer w10: LED14.3@10270,3931.81 LED14.3@10271,3930.81 ; v1(10271,4079) LED14.3@10271,3930.81 ; LED14.3 LED14.3@10271,3930.81
  Bottom Layer w10: U8.7 9959,3893 10000,3934 10085,3934 10092,3941 10210,3941 10271,4002 v1(10271,4079)
NetLED15_1: LED15.1 U9.4 | length 641.3
  Top Layer w10: v1(10706,4179) 10706,3929.74 LED15.1
  Bottom Layer w10: U9.4 10609,3971 10631,3993 10642,3993 10706,4057 v1(10706,4179)
NetLED15_2: LED15.2 U9.3 | length 544.6
  Top Layer w10: LED15.2 10641,3929.74 v1(10641,4129)
  Bottom Layer w10: U9.3@10561,3837 10561,4010 10571,4020 10603,4020 10641,4058 v1(10641,4129)
NetLED15_3: LED15.3 U9.2 | length 422.2
  Top Layer w10: LED15.3@10570,3931.81 LED15.3@10571,3930.81 ; v1(10571,4079) LED15.3@10571,3930.81 ; LED15.3 LED15.3@10571,3930.81
  Bottom Layer w10: U9.2 10509,4017 v1(10571,4079)
NetLED16_1: LED16.1 U9.7 | length 782.8
  Top Layer w10: LED16.1@11005,3930.74 LED16.1@11006,3929.74 ; v1(11006,4179) LED16.1@11006,3929.74 ; LED16.1 LED16.1@11006,3929.74
  Bottom Layer w10: U9.7 10759,3921 10822,3984 10966,3984 11006,4024 v1(11006,4179)
NetLED16_2: LED16.2 U9.6 | length 662.8
  Top Layer w10: LED16.2 10941,3929.74 v1(10941,4129)
  Bottom Layer w10: U9.6@10707,3837 10707,3933 10798,4024 10923,4024 10941,4042 v1(10941,4129)
NetLED16_3: LED16.3 U9.5 | length 528.6
  Top Layer w10: LED16.3@10870,3931.81 LED16.3@10871,3930.81 ; v1(10871,4079) LED16.3@10871,3930.81 ; LED16.3 LED16.3@10871,3930.81
  Bottom Layer w10: U9.5@10660,3836 10660,3946 10793,4079 v1(10871,4079)
NetRF1_1: RF1.1 U6.10 | length 1734.2
  Top Layer w10: RF1.1 3723,3216 3802,3137 4100,3137 4375,3412 5020,3412 v1(5027,3419)
  Bottom Layer w10: v1(5027,3419) 5061.02,3453.02 U6.10
NetRF1_2: RF1.2 U6.11 | length 1585.4
  Top Layer w10: RF1.2 3720,3316 3799,3237 4091,3237 4317,3463 4905,3463 v1(4931,3489)
  Bottom Layer w10: v1(4931,3489) 5024.56,3582.56 U6.11
NetRF1_3: RF1.3 U6.14 | length 1585.7
  Top Layer w10: RF1.3 3721,3416 3800,3337 4092,3337 4263,3508 4764,3508 v1(4836,3580)
  Bottom Layer w10: v1(4836,3580) 4827,3589 4827,3650 4887.51,3710.51 U6.14
NetRF1_4: RF1.4 U6.15 | length 1544.3
  Top Layer w10: RF1.4 3718,3516 3797,3437 4105,3437 4237,3569 4718,3569 4770,3621 v1@4770,3687
  Bottom Layer w10: v1(4768,3687) 4823.01,3742.01 U6.15
NetU2_9: U2.9 U4.14 | length 821.6
  Bottom Layer w10: U2.9 6809,3485 6823,3471 7345,3471 7359,3485 U4.14
NetU3_1: U3.1 Y1.1 | length 626.1
  Bottom Layer w10: U3.1 4683,3531 4867.92,3346.08 Y1.1
NetU3_2: U3.2 Y1.2 | length 511.9
  Bottom Layer w10: U3.2 4661,3481 4676,3466 4676,3312 4608.08,3244.08 Y1.2
NetU4_9: U4.9 U5.14 | length 825.9
  Bottom Layer w10: U4.9 7609,3479 7618,3470 8144,3470 8159,3485 U5.14
NetU5_9: U5.9 U7.14 | length 818.8
  Bottom Layer w10: U5.9 8409,3487 8423,3473 8947,3473 8959,3485 U7.14
NetU7_9: U7.9 U8.14 | length 820.4
  Bottom Layer w10: U7.9 9209,3482 9220,3471 9740,3471 9759,3490 U8.14
NetU8_9: U8.9 U9.14 | length 821.6
  Bottom Layer w10: U8.9 10009,3483 10021,3471 10543,3471 10559,3487 U9.14
PGC: J1.5 U6.16 | length 1149.3
  Top Layer w10: J1.5 4390,4282 v1(4620,4052)
  Bottom Layer w10: v1(4620,4052) 4628,4044 4628,3909 4763.5,3773.5 U6.16
PGD: J1.4 U6.17 | length 1037
  Top Layer w10: J1.4 4490,4306 v1(4719,4077)
  Bottom Layer w10: v1@4728,4077 4719,4068 4719,3923 4837,3805 U6.17
RX: P3.2 U6.1 | length 823.6
  Top Layer w10: v1(5369,3547) 5369,3478 5705,3142 5865,3142 5895,3172 P3.2
SCL: R1.1 U1.6 U3.6 U6.37 | length 3060.8
  Bottom Layer w10: U1.6 3955,3427 3980,3402 3980,3343 4016,3307 4180,3307 4212,3339 4212,3399 4244,3431 U3.6 4377,3431 4409,3463 4409,3575 4463,3629 4666,3629 5178,3117 ; 5179,3118 5404,3118 5431,3145 R1.1 5450,3196 5658,3404 5658,3692 5482.01,3867.99 U6.37
SDA: R2.1 U1.5 U3.5 U6.42 | length 2585.5
  Top Layer w10: v1(4271,3176) 4271,3206 4342,3277 5319,3277 v1(5369,3327)
  Bottom Layer w10: U1.5 3884.51,3334.49 3962,3257 4209,3257 4271,3319 ; v1(4271,3176) 4271,3319 ; U3.5 4271,3334.49 4271,3319 ; R2.1 5400,3314 5579,3493 5579,3668 5536.49,3710.51 U6.42
SIGHALL: Hall1.3 R8.1 U6.36 | length 1562.5
  Top Layer w10: Hall1.3 4569,3987 4659,3897 4816.5,3897 4901.5,3812 5204,3812 v1(5289,3897)
  Bottom Layer w10: Hall1.3 4406,3987 4480,4061 4480,4137 R8.1 ; v1(5289,3897) 5406.95,3897 U6.36
SQW: R3.2 U3.7 U6.8 | length 1940.5
  Top Layer w10: v1(4152,3698) 4222,3628 4643,3628 4696,3681 4696,3771 4734,3809 4831,3809 5118,3522 v1(5118,3369)
  Bottom Layer w10: v1@4151,3689 4151,3628 4195,3584 4195,3516 4230,3481 U3.7 ; v1(5118,3369) 5126,3377 R3.2 5124.01,3421.99 U6.8
TX: P3.1 U6.44 | length 608.6
  Top Layer w10: v1(5465,3493) 5485,3493 5729,3249 P3.1
  Bottom Layer w10: U6.44 5465,3591.96 v1(5465,3493)
VCC: C2.1 Hall1.1 J1.2 P2.3 R1.2 R2.2 R3.1 R5.2 R6.2 R8.2 RF1.7 U1.8 U2.10 U2.16 U3.8 U4.10 U4.16 U5.10 U5.16 U6.7 U6.28 U7.10 U7.16 U8.10 U8.16 U9.10 U9.16 | length 12636.1
  Top Layer w10: P2.3 P2.3@3665,4589 ; v1@5094,4315 v1(5103,4306) ; v1(6460,3520) v1(6760,3520) v1(7260,3520) v1(7560,3520) v1(8060,3520) v1(8360,3520) v1(8860,3520) v1(9160,3520) v1(9660,3520) v1(9960,3520) v1(10460,3520) v1(10760,3520)
  Top Layer w15: P2.3@3665,4589 C2.1 4048,4666 4653,4666 4690,4629 J1.2 4690,4515 4890,4315 v1@5094,4315 ; v1(5103,4306) 5151,4306 5521,3936 5521,3799 5800,3520 v1(6460,3520)
  Bottom Layer w10: Hall1.1@4258,3803 Hall1.1 4274,3703 4317.51,3659.49 U3.8 ; R8.2 4392,4203 4421,4232 4676,4232 4714,4270 R6.2 4707,4343 4707,4550 J1.2 ; R5.2 5104,4223 5187,4140 U6.28 5187,3867 5155.5,3835.5 U6.7 5155.5,3493.5 R3.1@5228,3421 ; R3.1 5210,3340 5235,3315 5235,3270 5307,3198 5321,3198 5319,3196 R1.2 ; v1(6460,3520) U2.16@6460,3614 ; v1(6760,3520) U2.10@6760,3614 ; v1(7260,3520) U4.16@7260,3614 ; v1@7559,3521 U4.10 ; v1@8059,3521 U5.16 ; v1@8359,3521 U5.10 ; v1@8859,3521 U7.16 ; v1@9159,3521 U7.10 ; v1@9659,3521 U8.16 ; v1@9959,3521 U8.10 ; v1@10459,3521 U9.16 ; v1@10759,3521 U9.10
  Bottom Layer w15: RF1.7 3667.02,3816 3879.51,3603.51 4097,3821 4097,3853 ; U1.8 3884.51,3598.51 ; Hall1.1@4258,3803 4147,3803 4097,3853 ; R8.2 4232,4141 4097,4006 4097,3853
VIN+: R6.1 R7.2 U6.21 | length 846.4
  Top Layer w10: v1(4579,4340) 4746,4340 v1(4917,4169)
  Bottom Layer w10: R7.2 R6.1 ; v1(4917,4169) 4872,4124 4872,3956 4897.02,3930.98 U6.21
pads on no net: RF1.6 U6.2 U6.3 U6.4 U6.5 U6.9 U6.12 U6.13 U6.19 U6.20 U6.22 U6.23 U6.24 U6.32 U6.33 U6.34 U6.35 U6.38 U6.39 U6.40 U6.41 U6.43 U9.9

## Keep-outs
Keep-Out Layer:
  lines w10: 3550,4725 5925,4725 6275,4375 8505,4375 8580,4300 9312.5,4300 10350,4300 10357,4300 10981,4300 11162,4119 11162,3544 10978,3360 9674.75,3360 8580,3360 8515,3295 6235,3295 5967,3027 3567,3027 3465,3129 3465,4638 3550.5,4723.5 3550.5,4724.5

## Other copper
Top Layer:
  text "pLED" at 5820,4203 h100